# Altium PCB GPM8F.PcbDoc
Units mil, origin at the board's own origin, x right, y up, seen from the top; angles counter-clockwise.
Board outline 6000 x 4000 mil, 2 copper layers (Top Layer, Bottom Layer); 41 components, 68 nets, 215 pads, 0 vias.
Unrouted connection lines stored in the file: 144.
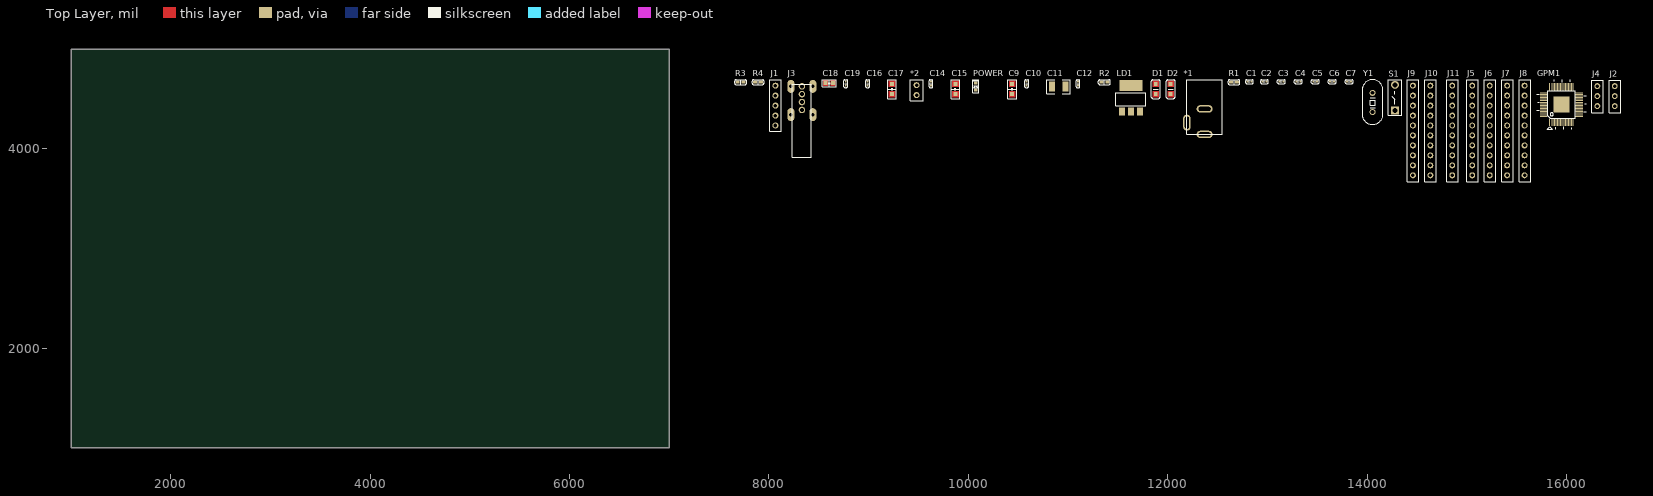
[diagram p0: Top Layer view]
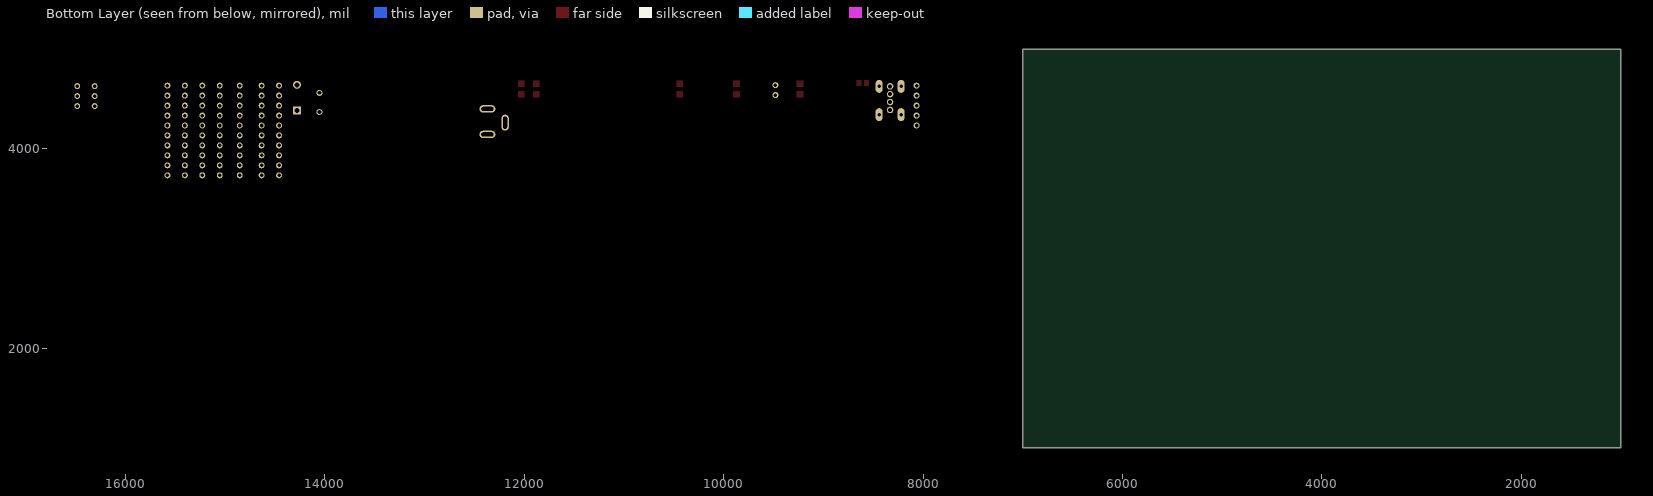
[diagram p1: Bottom Layer view, seen from below]

## Layer stack, top to bottom
Top Layer: signal copper 1.4
Dielectric: dielectric 12.6, FR-4, Dk 4.8
Bottom Layer: signal copper 1.4

## Board outline
1000,1000 7000,1000 7000,5000 1000,5000

## Design rules (kind name [scope] priority, off if disabled: settings)
Clearance [All] p1: gap=10
PolygonConnect [All] p1: connectstyle=Relief reliefconductorwidth=10 reliefentries=4 polygonreliefangle="90 Angle"
RoomDefinition GPM8F3496A [InComponentClass('GPM8F3496A')] p1: confinementstyle=ConfineIn formatcopy=TRUE lockcomponents=FALSE outline 7645,3660 16555,3660 16555,4805 7645,4805
RoutingVias [All] p1: holewidth=28 width=50 viastyle="Through Hole" minholewidth=28 minwidth=50 maxholewidth=28 maxwidth=50
SilkscreenOverComponentPads [All] p1: minsilkscreentomaskgap=10
SolderMaskExpansion [All] p1: expansion=4
Width [All] p1: maxlimit=10 minlimit=10 preferedwidth=10
27 further rules are at their usual default settings.

## Components (designator, comment, footprint, x,y, rotation, side; value= is the part's Value field where it differs from the comment)
*1 "DC-5V" DC-5V 12370,4145 r0 top
*2 "2PIN_PITCH_2.54MM" 2PIN_PITCH_2.54MM 23115,9315 r0 top
C1 "Cap" C0402 18410,5145 r0 top
C2 "Cap" C0402 18560,5145 r0 top
C3 "Cap" C0402 18730,5145 r0 top
C4 "Cap" C0402 18900,5145 r0 top
C5 "2.2uF" C0402 19070,5145 r0 top
C6 "Cap" C0402 19240,5145 r0 top
C7 "Cap" C0402 19410,5145 r0 top
C9 "10uF" C1206 10440,4600 r90 top
C10 "0.1uF" C0402 10115,10245 r90 top
C11 "100uF" 1210 10905,4625 r0 top
C12 "0.1uF" C0402 10630,10245 r90 top
C14 "0.1uF" C0402 9155,10245 r90 top
C15 "10uF" C1206 9870,4600 r90 top
C16 "0.1uF" C0402 8520,10245 r90 top
C17 "10uF" C1206 9235,4600 r90 top
C18 "47uF" C0805 8605,4660 r0 top
C19 "0.1uF" C0402 8300,10245 r90 top
D1 "DIODE" R1206 11875,4600 r90 top
D2 "DIODE" R1206 12025,4600 r90 top
GPM1 "GPM8F3496A LQFP64" "GPM8F3496A LQFP64" 15950,4430 r0 top
J1 "HEADER5*2_2.54MM" HEADER5_2.54MM 8065,4435 r0 top
J2 "HEADER3_2.54MM" HEADER3_2.54MM 16475,4435 r0 top
J3 "USB-A8" USB-A8 8330,4470 r0 top
J4 "HEADER3_2.54MM" HEADER3_2.54MM 16300,4435 r0 top
J5 "header10_2.54MM" HEADER10_2.54MM 15055,4235 r0 top
J6 "header10_2.54MM" HEADER10_2.54MM 15230,4235 r0 top
J7 "header10_2.54MM" HEADER10_2.54MM 15405,4235 r0 top
J8 "header10_2.54MM" HEADER10_2.54MM 15580,4235 r0 top
J9 "header10_2.54MM" HEADER10_2.54MM 14460,4235 r0 top
J10 "header10_2.54MM" HEADER10_2.54MM 14635,4235 r0 top
J11 "header10_2.54MM" HEADER10_2.54MM 14855,4235 r0 top
LD1 "SOT-223" LD1117S33TR 11630,4500 r0 top
POWER "LED3" LED_0603 10075,4625 r90 top
R1 "10K" R0603 12665,4670 r0 top
R2 "1K" R0603 11365,4670 r0 top
R3 "100K" R0603 7715,4670 r0 top
R4 "100K" R0603 7890,4670 r0 top
S1 "SW-PB" SWSW-2P-6.5M 14270,4520 r90 top
Y1 "8MHZ" XTAL8M 14055,4470 r0 top

## Footprints (in the part's own frame and the unit in brackets; to place one, negate y for a bottom-side part, rotate by r counter-clockwise, add the part's x,y. Pads: shape width x height; smd on the part's side, far side on the other; paste and mask are expansions set on the pad)
2PIN_PITCH_2.54MM [mm]
  round 1.5 hole 0.9: 1(-346.329,-118.745) 2(-346.329,-121.285)
  silkscreen extent -347.98,-122.68 -344.68,-117.35
1210 [mil]
  rect 60x100 smd: 1(-67.5,0) 2(67.5,0)
  silkscreen extent -118,-70 118,70
C0402 [mil] "CAP"
  rect 20x20 smd: 1(-5610,-470) 2(-5570,-470)
  silkscreen extent -5629,-489 -5551,-451
C0805 [mil]
  rect 40x40 smd: 1(-37.4,0) 2(37.4,0)
  Top Layer region: -59.06,27.56 -15.75,27.56 -15.75,-27.56 -59.06,-27.56 -59.06,27.56
  Top Layer region: 59.06,-27.56 15.75,-27.56 15.75,27.56 59.06,27.56 59.06,-27.56
  Top Layer pour cut-out: -15.35,34.65 -15.35,-33.46 16.14,-33.46 16.14,34.65 -15.35,34.65
  silkscreen extent -71,-35 71,35
C1206 [mil]
  rect 40x40 smd: 1(-50,0) 2(50,0)
  Top Layer region: 23.62,-31.5 23.62,31.5 82.68,31.5 82.68,-31.5 23.62,-31.5
  Top Layer region: -23.62,31.5 -23.62,-31.5 -82.68,-31.5 -82.68,31.5 -23.62,31.5
  silkscreen extent -94,-43 94,43
DC-5V [mil]
  oval 160x75 hole 40 slot 120 at 0 deg: 1(0,0) 2(0,255.91)
  oval 75x160 hole 40 slot 120 at 90 deg: 3(-177.17,118.11)
  silkscreen extent -177,0 177,551
"GPM8F3496A LQFP64" [mm]
  oval 0.254x2 smd: 1(-3,-4.119) 2(-2.6,-4.119) 3(-2.2,-4.119) 4(-1.8,-4.119) 5(-1.4,-4.119) 6(-1,-4.119) 7(-0.6,-4.119) 8(-0.2,-4.119) 9(0.2,-4.119) 10(0.6,-4.119) 11(1,-4.119) 12(1.4,-4.119) 13(1.8,-4.119) 14(2.2,-4.119) 15(2.6,-4.119) 16(3,-4.119) 33(3,4.881) 34(2.6,4.881) 35(2.2,4.881) 36(1.8,4.881) 37(1.4,4.881) 38(1,4.881) 39(0.6,4.881) 40(0.2,4.881) 41(-0.2,4.881) 42(-0.6,4.881) 43(-1,4.881) 44(-1.4,4.881) 45(-1.8,4.881) 46(-2.2,4.881) 47(-2.6,4.881) 48(-3,4.881)
  oval 2x0.254 smd: 17(4.5,-2.631) 18(4.5,-2.231) 19(4.5,-1.831) 20(4.5,-1.431) 21(4.5,-1.031) 22(4.5,-0.631) 23(4.5,-0.231) 24(4.5,0.169) 25(4.5,0.569) 26(4.5,0.969) 27(4.5,1.369) 28(4.5,1.769) 29(4.5,2.169) 30(4.5,2.569) 31(4.5,2.969) 32(4.5,3.369) 49(-4.5,3.369) 50(-4.5,2.969) 51(-4.5,2.569) 52(-4.5,2.169) 53(-4.5,1.769) 54(-4.5,1.369) 55(-4.5,0.969) 56(-4.5,0.569) 57(-4.5,0.169) 58(-4.5,-0.231) 59(-4.5,-0.631) 60(-4.5,-1.031) 61(-4.5,-1.431) 62(-4.5,-1.831) 63(-4.5,-2.231) 64(-4.5,-2.631)
  rect 4.06x4.06 smd: 65(0,0.381)
  silkscreen extent -6.31,-5.97 6.35,6.73
HEADER3_2.54MM [mm]
  round 1.5 hole 0.9: 1(0.254,4.953) 2(0.254,2.413) 3(0.254,-0.127)
  silkscreen extent -1.14,-1.78 1.78,6.48
HEADER5_2.54MM [mm]
  round 1.5 hole 0.9: 1(0,5.08) 2(0,2.54) 3(0,0) 4(0,-2.54) 5(0,-5.08)
  silkscreen extent -1.4,-6.6 1.52,6.6
HEADER10_2.54MM [mm]
  round 1.5 hole 0.9: 1(0,10.16) 2(0,7.62) 3(0,5.08) 4(0,2.54) 5(0,0) 6(0,-2.54) 7(0,-5.08) 8(0,-7.62) 9(0,-10.16) 10(0,-12.7)
  silkscreen extent -1.4,-14.35 1.52,11.68
LD1117S33TR [mil] "SOT-223"
  rect 60x80 smd: 1(-90.55,-125) 2(0,-125) 3(90.55,-125)
  rect 230x110 smd: 4(0,138)
  silkscreen extent -150,-65 150,65
LED_0603 [mil]
  rect 30x35 smd: 1(-35,0) 2(35,0)
  silkscreen extent -60,-30 71,30
R0603 [mil]
  rect 40x30 smd: 1(-30,0) 2(30,0)
  silkscreen extent -60,-25 60,25
R1206 [mil]
  rect 40x40 smd: 1(-50,-5) 2(50,-5)
  Top Layer region: -23.62,26.5 -23.62,-36.5 -82.68,-36.5 -82.68,26.5 -23.62,26.5
  Top Layer region: 23.62,-36.5 23.62,26.5 82.68,26.5 82.68,-36.5 23.62,-36.5
  silkscreen extent -94,-48 94,38
SWSW-2P-6.5M [mil]
  rect 80x80 hole 51.18: 1(-132.95,-10)
  round 80 hole 51.18: 2(122.95,-10)
  silkscreen extent -182,-79 172,59
USB-A8 [mil]
  round 65 hole 40: 1(0,-78.74) 2(0,0) 3(0,78.74) 4(0,157.48)
  oval 70.87x130 hole 35: 5(110,157.48) 6(-110,157.48) 7(-110,-125.98) 8(110,-125.98)
  silkscreen extent -95,-551 94,176
XTAL8M [mil]
  round 60 hole 37: 1(0,-100) 2(0,92.13)
  silkscreen extent -100,-225 100,225

## Part data
C1 C2 C3 C4 C6 C7: "Capacitor"
C5 C10 C12 C14 C16 C19: library part Cap, "Capacitor"
C9 C11 C15 C17 C18: library part Cap2, "Capacitor"
D1: library part "Diode 1N4149", "Computer Diode"
D2: library part "Diode 1N914", "High Conductance Fast Diode"
LD1: library part LD1117S33TR
POWER: "Typical BLUE SiC LED"
R1 R2 R3 R4: library part Res3, "Resistor"
S1: "Switch"
Y1: library part XTAL, "Crystal Oscillator"

## Nets (pads, with @x,y where several pads share a name; then routed paths per layer and width w, separated by ;. In a path a pad name is that pad's centre, name@x,y a point inside that pad or via, vN(x,y) a via of type N, cw(c..) or ccw(c..) an arc to the next point about the centre after c; other vN are vias at no path point)
ADC_VREF: C4.2 GPM1.6
DM: GPM1.58 J3.2
DP: GPM1.59 J3.3
ICE_VDD: C1.2 C2.2 C14.2 C15.1 C16.2 C17.1 C18.1 C19.2 D2.2 GPM1.2 J1.1 J3.1 J5.1 J6.1 J7.1 J8.1 J9.1 J10.1 J11.1 R2.2 S1.2
NetPOWER_1: POWER.1 R2.1
P00: GPM1.16 J5.2
P01: GPM1.17 J5.3
P02: GPM1.18 J5.4
P03: GPM1.19 J5.5
P04: GPM1.20 J5.6
P05: GPM1.21 J5.7
P06: GPM1.22 J5.8
P07: GPM1.23 J5.9
P10: GPM1.8 J6.2
P11: GPM1.9 J6.3
P12: GPM1.10 J6.4
P13: GPM1.11 J6.5
P14: GPM1.12 J6.6
P15: GPM1.13 J6.7
P16: GPM1.14 J6.8
P17: GPM1.15 J6.9
P20: GPM1.34 J7.2
P21: GPM1.35 J7.3
P22: GPM1.36 J7.4
P23: GPM1.37 J7.5
P24: GPM1.38 J7.6
P25: GPM1.39 J7.7
P26: GPM1.40 J7.8
P27: GPM1.41 J7.9
P30: GPM1.54 J8.2
P31: GPM1.55 J8.3
P32: GPM1.56 J8.4
P33: GPM1.57 J8.5
P34: GPM1.60 J8.6
P35: GPM1.61 J8.7
P36: GPM1.62 J8.8
P37: GPM1.63 J8.9
P40: GPM1.3 J9.2
P41: GPM1.4 J4.2 J9.3
P42: GPM1.5 J4.1 J9.4
P43: GPM1.32 J1.4 J9.5 R3.2
P44: C6.2 GPM1.48 J2.1 J9.6 Y1.1
P45: C7.2 GPM1.49 J2.2 J9.7 Y1.2
P46: GPM1.50 J9.8
P47: GPM1.51 J9.9
P50: GPM1.42 J10.2
P51: GPM1.43 J10.3
P52: GPM1.44 J10.4
P53: GPM1.45 J10.5
P54: GPM1.46 J10.6
P55: GPM1.47 J10.7
P56: GPM1.52 J10.8
P57: GPM1.53 J10.9
P60: GPM1.24 J11.2
P61: GPM1.25 J11.3
P62: GPM1.26 J11.4
P63: GPM1.27 J11.5
P64: GPM1.28 J11.6
P65: GPM1.29 J11.7
P66: GPM1.30 J11.8
P67: GPM1.31 J11.9
RST: GPM1.33 J1.3 R1.2 R4.2 S1.1
V18: C3.2 GPM1.1
V33: C5.2 GPM1.64
VCC_3.3V: C11.1 C12.2 D2.1 LD1.2
VCC_5V: C9.1 C10.2 D1.2 LD1.3
VCC_5V_UV: *1.1 *2.2 D1.1
VSS: *1.2 *1.3 *2.1 C1.1 C2.1 C3.1 C4.1 C5.1 C6.1 C7.1 C9.2 C10.1 C11.2 C12.1 C14.1 C15.2 C16.1 C17.2 C18.2 C19.1 GPM1.7 J1.5 J2.3 J3.4 J3.5 J3.6 J3.7 J3.8 J4.3 J5.10 J6.10 J7.10 J8.10 J9.10 J10.10 J11.10 LD1.1 POWER.2 R1.1 R3.1 R4.1
pads on no net: GPM1.65 J1.2 LD1.4